# Altium PCB Tow_FOC.PcbDoc (part 3 of 3)
Units mil, origin at the board's own origin, x right, y up, seen from the top; angles counter-clockwise.
Board outline 3149.61 x 2165.35 mil, 4 copper layers (Top Layer, Layer 1, Layer 2, Bottom Layer), stack 23.756 mil thick; 186 components, 138 nets, 677 pads, 434 vias.
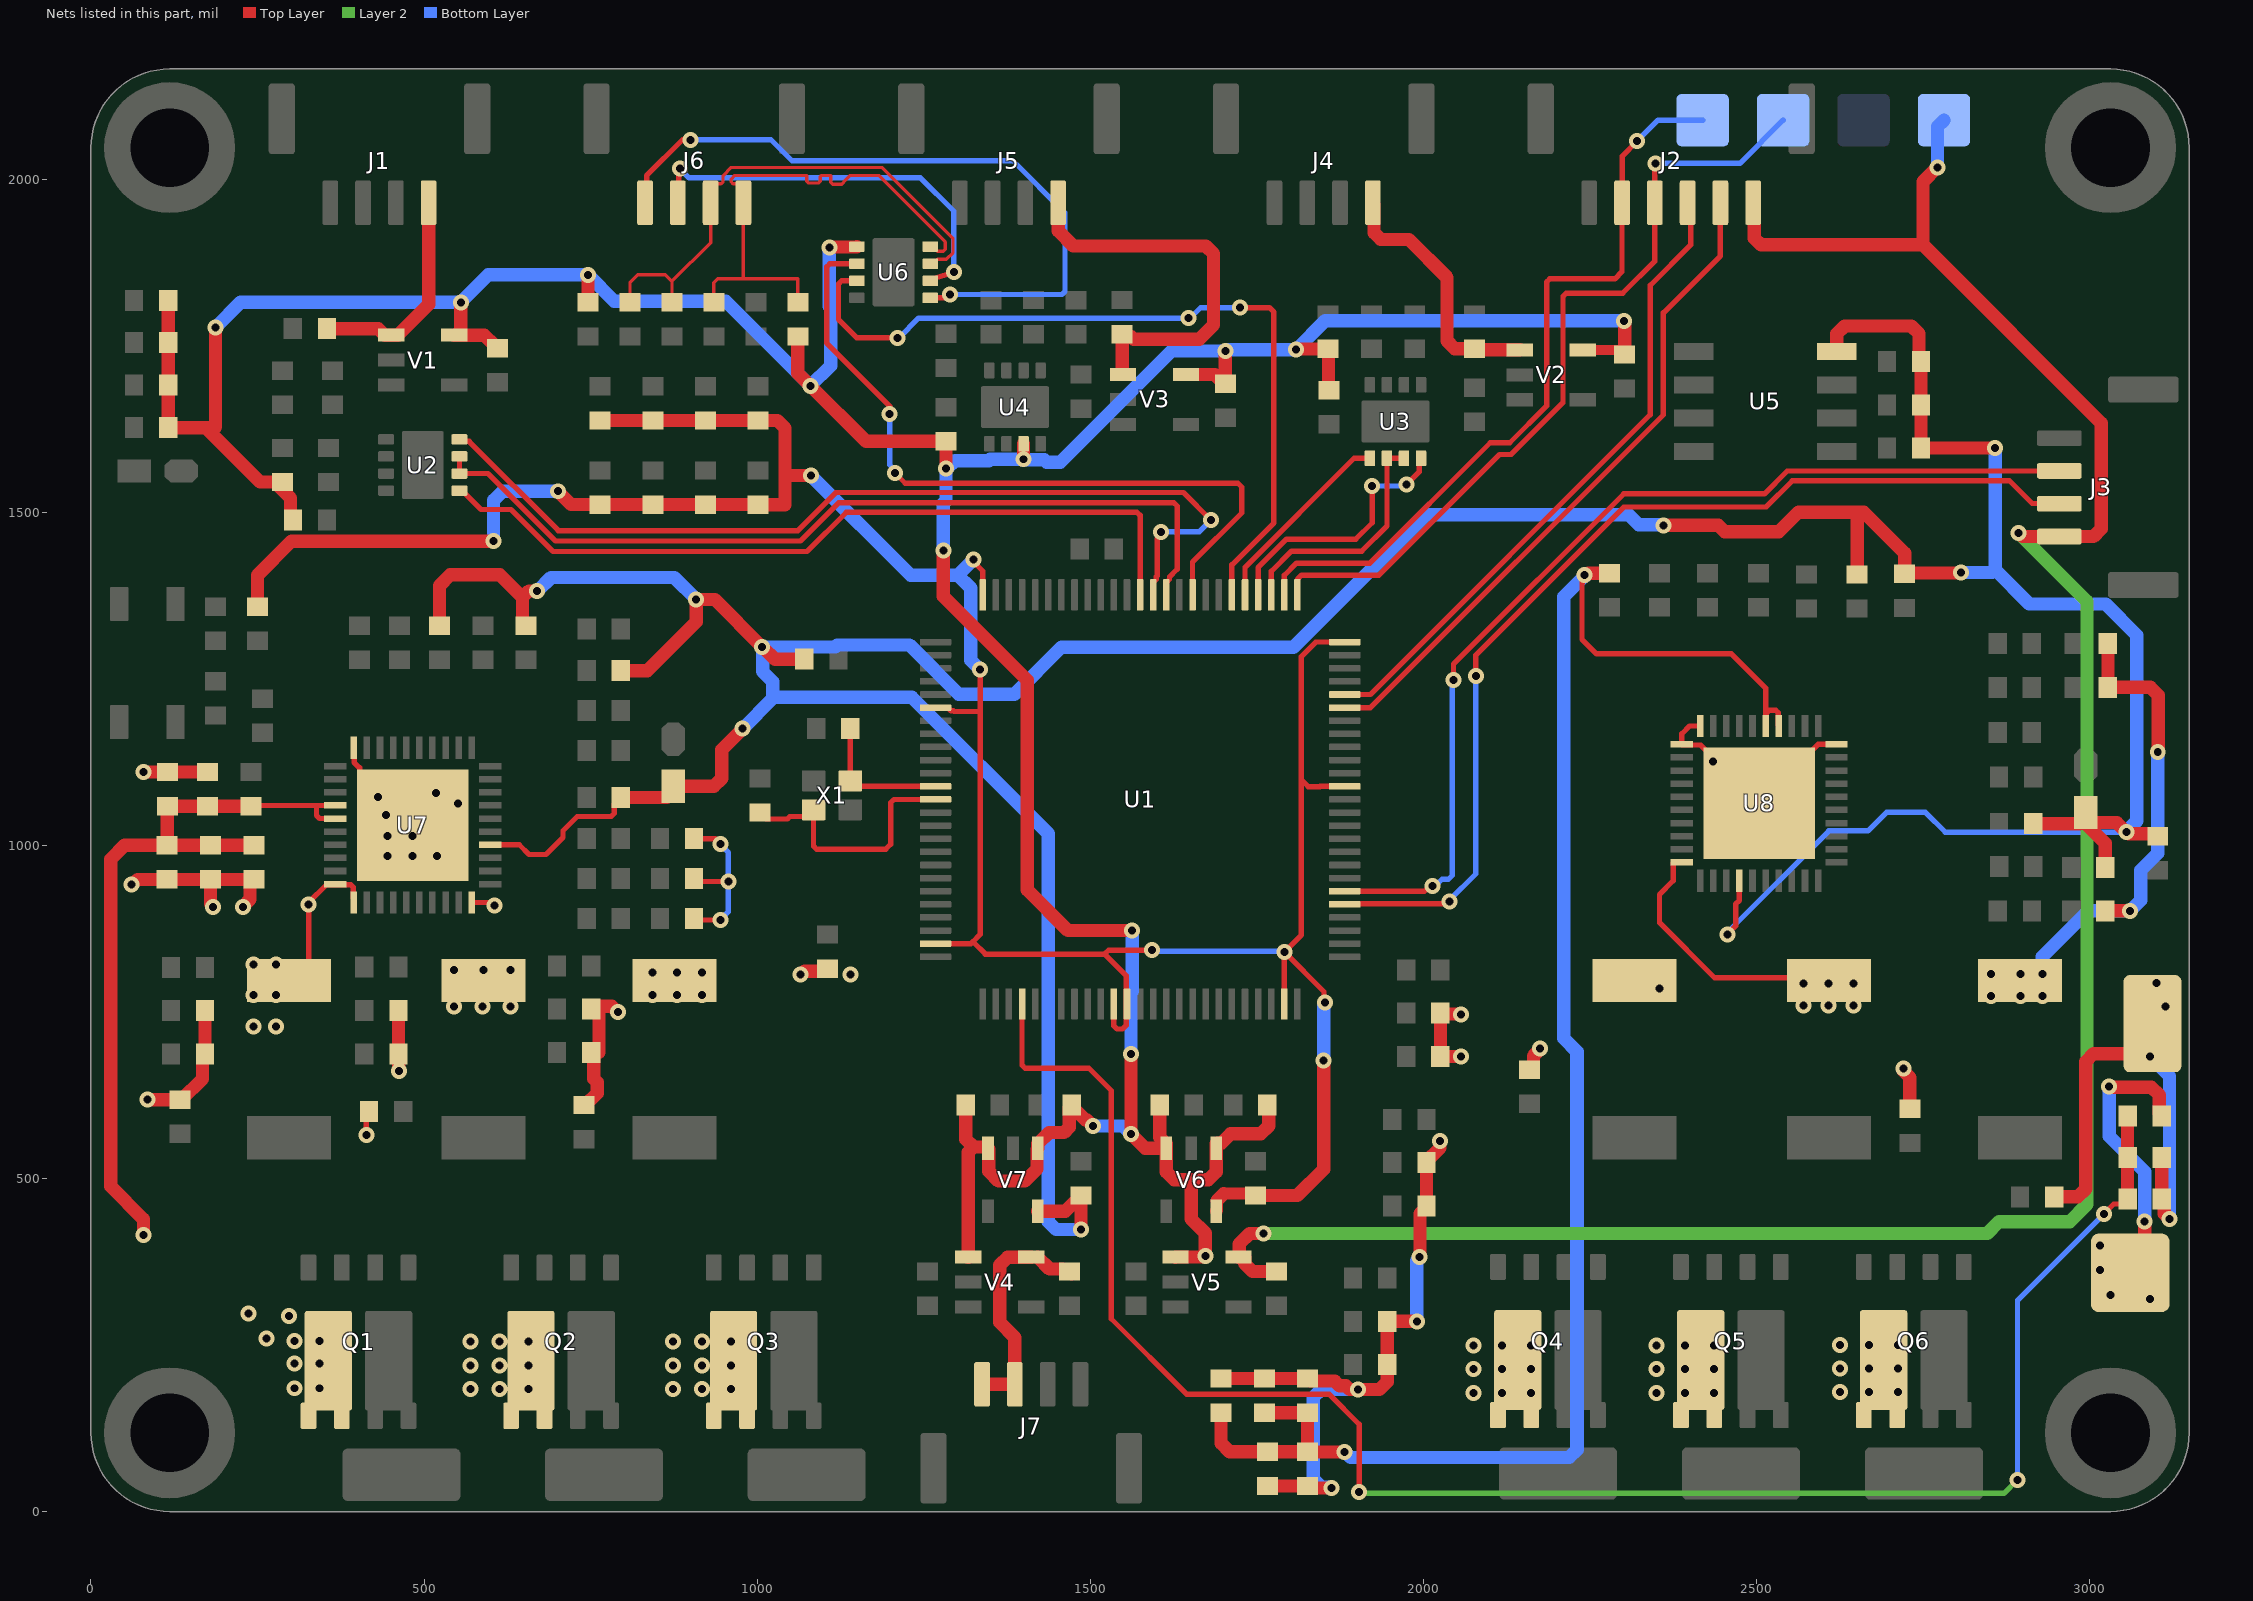
[diagram p5: the nets of this part, all layers, seen from the top]

## Via types
v1: diameter 24, hole 12, Top Layer to Bottom Layer, tented both sides, 434 vias

## Nets (pads, with @x,y where several pads share a name; then routed paths per layer and width w, separated by ;. In a path a pad name is that pad's centre, name@x,y a point inside that pad or via, vN(x,y) a via of type N, cw(c..) or ccw(c..) an arc to the next point about the centre after c; other vN are vias at no path point) (continued)
PGND: C31.1 C32.1 C34.1 C35.1 C36.1 C40.1 C41.1 C42.1 C43.2 C44.2 C45.2 C46.1 C47.1 C48.1 C49.1 C50.1 C52.1 C53.1 C54.1 C58.1 C59.1 C60.1 C61.2 C62.2 C63.2 C64.1 C65.1 C66.1 C67.1 R30.2 R34.1 R35.1 R36.1 R37.1 R38.1 R39.1 R55.1 R56.1 R57.1 R58.1 R59.1 R60.1 R74.2 TP12.1 U7.10 U7.11 U7.20 U7.40 U7.41 U8.10 U8.11 U8.20 U8.40 U8.41 | length 4984.1
  Top Layer w8: v1(244.09,775.59) 275.59,775.59 R37.1@297.24,797.24 298.29,797.24 326.77,825.72 v1(326.77,911.42) 326.77,914.12 353.5,940.85 365.97,940.85 U7.10@366.89,941.77 ; U7.10@367.72,940.94 389.76,940.94 393.52,937.18 393.52,921.04 U7.11@394.45,920.12 ; U7.40@394.45,1146.5 395.13,1145.82 395.13,1124.56 403.37,1116.32 403.37,1100.57 v1(431.1,1072.83) U7.41@440.55,1072.83 ; v1(413.39,564.96) 413.39,596.46 C44.2@417.33,600.4 ; U7.41@435.83,1077.56 U7.41@440.55,1072.83 ; U7.41@483.03,1030.36 U7.41@440.55,1072.83 ; U7.20@571.61,914.22 598.77,914.22 603.2,909.79 v1(606.04,909.79) ; R39.1@864.52,768.76 871.35,775.59 v1(879.92,775.59) ; C48.1@905.28,890 907.49,887.8 v1(944.88,887.8) ; C47.1@905.28,950 909.52,945.76 v1(956.69,945.76) ; C46.1@905.28,1010 936.85,1010 v1(944.88,1001.97) ; U8.20@2387.8,974.41 2375.98,974.41 2375.06,973.49 2375.06,946.91 2354.33,926.18 2354.33,883.86 2437.01,801.18 2562.65,801.18 v1(2570.87,792.96) ; U8.10@2415.35,1179.13 2399.61,1179.13 2387.8,1167.32 U8.11@2387.8,1151.57 2388.72,1150.65 2416.28,1150.65 2435.04,1131.89 v1(2435.04,1125.98) ; U8.41@2503.94,1062.99 2592.52,1151.57 U8.40@2620.08,1151.57
  Top Layer w20: v1(61.02,940.94) 62.11,940.94 69.98,948.82 C35.1@114.41,948.82 C36.1@179.41,948.82 ; v1(78.74,1110.24) 78.97,1110.01 C31.1@114.99,1110.01 C32.1@174.99,1110.01 ; v1(84.65,618.11) C43.2@133.86,618.11 ; C43.2@135.83,618.11 167.48,649.76 167.48,683.15 R34.1@171.26,686.93 C40.1@171.26,751.93 ; v1(183.07,907.48) 183.07,908.56 179.41,912.23 C36.1@179.41,948.82 ; v1(228.35,907.48) 228.35,908.56 238.66,918.87 238.66,945.04 C34.1@242.44,948.82 ; C34.1@244.41,948.82 C34.1@242.44,948.82 ; C41.1@461.61,747.05 R35.1@461.61,687.13 462.1,686.63 462.1,661.91 v1(462.6,661.42) ; C45.2@740.16,610.23 742.13,610.23 759.84,627.95 759.84,644.51 754.53,649.83 754.53,685.31 R36.1@750.75,689.09 ; C42.1@750.75,754.09 750.75,754.69 754.53,758.47 781.79,758.47 790.26,750 v1(791.34,750) ; R36.1@762.56,689.09 C42.1@762.56,754.09 ; v1(1064.96,806.1) 1066.04,806.1 1071.12,811.18 1101.53,811.18 R30.2@1103.13,812.78 ; C52.1@1696.34,199.57 C54.1@1761.34,199.57 C53.1@1826.34,199.57 1830.12,195.79 1867.08,195.79 1874.04,188.84 1883.6,188.84 1889.36,183.07 v1(1901.57,183.07) 1933.91,183.07 1945.63,194.79 R57.1@1945.63,220.58 C60.1@1945.63,285.59 1990,285.59 v1(1990.16,285.43) ; C50.1@1765.74,38.38 C49.1@1825.74,38.38 1828.69,35.43 v1(1862.2,35.43) ; v1(1994.09,381.89) 1994.86,382.66 1994.86,446.98 2004.68,456.8 R56.1@2004.68,458.77 C59.1@2004.68,523.78 2004.68,525.74 2024.48,545.54 2024.48,555.73 v1(2025.02,556.27) ; v1(2056.74,682.99) R55.1@2025.6,682.99 C58.1@2025.6,747.99 2026.76,746.83 2055.97,746.83 v1(2056.74,746.06) ; C61.2@2159.45,663.38 2161.42,663.38 2165.2,667.16 2165.2,683.8 2175.2,693.8 v1(2175.2,694.88) ; v1(2720.47,665.35) 2720.47,661.42 2730.32,651.57 C62.2@2730.32,604.33 ; C63.2@2946.85,472.44 2982.38,472.44 2994.09,484.15 2994.09,675.29 3005.81,687.01 3086.61,687.01 v1(3090.55,683.07) ; C64.1@3023.63,901.58 v1(3061.02,901.57) ; C66.1@3027.56,1303.15 C65.1@3027.56,1237.17 3091.41,1237.17 3103.13,1225.45 3103.13,1140.53 v1(3102.36,1139.76) ; C67.1@3108.27,531.5 R74.2@3108.26,468.99 3112.04,465.21 3112.04,447.01 v1(3120.08,438.98) ; C36.1@179.41,948.82 C34.1@242.44,948.82
  Bottom Layer w8: v1(944.88,887.8) 944.88,888.67 956.69,900.48 v1(956.69,945.76) 956.69,989.28 944.88,1001.09 v1(944.88,1001.97)
  Bottom Layer w20: v1(1862.2,35.43) 1861.44,36.2 1847.6,36.2 1834.65,49.15 1834.65,171.36 1846.36,183.07 v1(1901.57,183.07) ; v1(1990.16,285.43) 1990.16,376.87 1994.09,380.81 v1(1994.09,381.89) ; v1(2929.13,807.09) 2929.13,832.68 2998.03,901.57 v1(3061.02,901.57) 3076.77,917.32 3076.77,962.6 3102.36,988.19 v1(3102.36,1139.76) ; v1(3090.55,683.07) 3090.55,682.73 3120.08,653.2 v1(3120.08,438.98)
  other v1: 244.09,728.35 277.56,728.35 545.28,757.87 587.6,757.87 629.92,757.87 3114.17,757.87 2570.87,759.84 2608.27,759.84 2645.67,759.84 2852.02,773.62 2896.02,773.62 2929.13,773.62 277.56,775.59 842.52,775.59 917.32,775.59 2354.61,785.08 2608.27,792.96 2645.67,792.96 3100.39,793.31 1139.76,806.1 2852.02,807.09 2896.02,807.09 842.52,809.06 879.92,809.06 917.32,809.06 545.28,812.99 589.17,812.99 629.75,812.99 244.09,820.87 277.56,820.87 444.88,984.25 482.28,984.25 519.68,984.25 444.88,1013.78 482.28,1013.78 442.91,1045.28 551.18,1062.99 517.72,1078.74
RCC_OSC_IN: C15.2 U1.12 X1.3 | length 209.8
  Top Layer w8: C15.2@1139.76,1175.19 1139.84,1175.11 X1.3@1139.84,1096.65 1147.91,1088.58 U1.12@1267.72,1088.58
RCC_OSC_OUT: C14.2 U1.13 X1.1 | length 397.4
  Top Layer w8: C14.2@1003.93,1049.22 1013.58,1039.57 1045.35,1039.57 1048.96,1043.17 1074.55,1043.17 X1.1@1084.72,1053.35 ; X1.1@1084.65,1053.27 1084.65,998.78 1089.33,994.09 1192.91,994.09 1200.44,1001.62 1200.44,1063.86 1205.47,1068.9 U1.13@1267.72,1068.9
RS422_A: J6.1 R21.2 R22.2 U6.8 | length 792.7
  Top Layer w5: R22.2@935.04,1814.96 935.04,1844.49 940.94,1850.39 979.33,1850.39 ; 1061.02,1850.39 979.33,1850.39 ; R21.2@1061.03,1814.96 1061.03,1850.39 ; U6.8@1259.84,1898.62 1263.78,1898.62 1270.57,1891.83 1279.15,1891.83 1282.08,1894.76 1282.08,1905.75 1182.3,2005.53 1139.38,2005.53 1129.65,1995.8 1129.65,1995.06 1126.72,1992.13 1113.17,1992.13 1110.24,1995.06 1110.24,2005.53 1096.46,2005.53 1094.49,2003.56 1094.49,1997.02 1091.56,1994.09 1077.15,1994.09 1074.22,1997.02 1074.22,2005.53 966.14,2005.53 960.72,2000.11 960.72,1995.97 963.65,1993.04 970.05,1993.04 979.33,1983.77 979.33,1850.39
RS422_B: J6.2 R23.2 R24.2 U6.7 | length 784
  Top Layer w5: R24.2@809.06,1814.96 809.06,1844.49 820.87,1856.3 862.21,1856.3 872.05,1846.46 ; R23.2@872.05,1814.96 872.05,1846.46 ; U6.7@1259.84,1873.03 1263.78,1873.03 1270.57,1879.83 1284.12,1879.83 1294.08,1889.79 1294.08,1910.72 1187.27,2017.53 1114.17,2017.53 1097.84,2017.53 961.17,2017.53 948.72,2005.08 948.72,1995.97 945.8,1993.04 939.39,1993.04 930.12,1983.77 930.12,1904.53 872.05,1846.46
RS422_Y: J6.4 U6.5 | length 1061.6
  Top Layer w8: J6.4@831.69,1964.57 834.09,1966.96 834.09,2005.35 887.8,2059.06 v1(899.61,2059.06) ; U6.5@1259.84,1821.85 1284.45,1821.85 v1(1289.37,1826.77)
  Bottom Layer w8: v1(899.61,2059.06) 1020.67,2059.06 1052.17,2027.56 1383.86,2027.56 1462.11,1949.31 1462.11,1831.46 1457.43,1826.77 v1(1289.37,1826.77)
RS422_Z: J6.3 U6.6 | length 619.6
  Top Layer w8: J6.3@880.91,1964.57 882.38,1966.04 882.38,2014.27 v1(883.86,2015.75) ; U6.6@1259.84,1847.44 1267.65,1851.31 v1(1295.28,1860.24)
  Bottom Layer w8: v1(883.86,2015.75) 897.64,2001.97 1245.08,2001.97 1295.28,1951.77 v1(1295.28,1860.24)
SWCLK: J2.5 TP3.1 U1.77 | length 1150.8
  Top Layer w8: U1.77@1791.34,1375.98 1791.34,1405.41 1809.5,1423.58 1919.64,1423.58 2100.39,1604.33 2129.69,1604.33 2185.04,1659.68 2185.04,1845.71 2189.73,1850.39 2287.4,1850.39 2298.23,1861.22 J2.5@2298.23,1964.57 2298.72,1965.06 2298.72,2034.68 2320.87,2056.83 v1(2320.87,2057.09)
  Bottom Layer w8: v1(2320.87,2057.09) 2352.36,2088.58 TP3.1@2419.29,2088.58
SWDIO: J2.4 TP2.1 U1.76 | length 1216.8
  Top Layer w8: U1.76@1811.02,1375.98 1811.1,1376.06 1811.1,1399.72 1816.96,1405.58 1933.14,1405.58 2114.17,1586.61 2131.78,1586.61 2209.65,1664.48 2209.65,1824.05 2214.33,1828.74 2299.21,1828.74 2347.44,1876.97 J2.4@2347.44,1964.57 2347.44,2014.76 2348.43,2015.75 v1(2348.43,2023.62)
  Bottom Layer w8: v1(2348.43,2023.62) 2475.07,2023.62 TP2.1@2540.03,2088.58
U1_RX: J2.3 U1.71 | length 978.1
  Top Layer w8: U1.71@1881.89,1226.38 1920.46,1226.38 2340.55,1646.47 2340.55,1840.55 2401.57,1901.57 2401.57,1959.65 J2.3@2396.65,1964.57
U1_TX: J2.2 U1.70 | length 1014.1
  Top Layer w8: U1.70@1881.89,1206.69 1920.58,1206.69 2360.24,1646.35 2360.24,1799.21 2445.87,1884.84 J2.2@2445.87,1964.57
U2_DE: U1.86 U2.2 U2.3 | length 1310.6
  Top Layer w8: U2.3@553.15,1583.66 U2.2@553.15,1558.07 596.09,1558.07 697.47,1456.69 1065.07,1456.69 1122.38,1514 1625.61,1514 1630.51,1509.09 1630.51,1414.6 1618.94,1403.03 1618.94,1399.45 1614.17,1394.68 U1.86@1614.17,1375.98
U2_RX: U1.88 U2.1 | length 1205.3
  Top Layer w8: U2.1@553.15,1532.48 557.09,1532.48 585.41,1504.16 630.2,1504.16 693.42,1440.94 1074.8,1440.94 1133.86,1500 1570.12,1500 1574.8,1495.31 U1.88@1574.8,1375.98
U2_TX: U1.87 U2.4 | length 1406.3
  Top Layer w8: U2.4@553.15,1609.25 556.02,1606.38 567.58,1606.38 701.52,1472.44 1061.02,1472.44 1118.11,1529.53 1639.76,1529.53 v1@1680.64,1488.65 ; U1.87@1594.49,1375.98 1594.49,1394.68 1599.25,1399.45 1599.25,1403.03 1600.39,1404.17 1600.39,1460.24 1606.3,1466.14 v1(1606.3,1470.47)
  Bottom Layer w8: v1(1606.3,1470.47) 1663.39,1470.47 v1(1681.1,1488.19)
U3_RX: J3.3 U1.56 | length 1518.9
  Top Layer w8: U1.56@1881.89,931.1 2001.58,931.1 2009.45,938.98 v1(2013.78,938.98) ; J3.3@2954.72,1562.01 2546.26,1562.01 2511.81,1527.56 2300.84,1527.56 2045.31,1272.03 v1@2045.31,1248.07 ; v1(2045.28,1248.03) v1@2045.31,1248.07
  Bottom Layer w8: v1(2013.78,938.98) 2018.11,938.98 2028.2,949.07 2037.65,949.07 2043.31,954.72 2043.31,1246.06 v1(2045.28,1248.03)
U3_TX: J3.2 U1.55 | length 1544.3
  Top Layer w8: U1.55@1881.89,911.42 1882.81,912.34 2036.35,912.34 v1(2039.37,915.35) ; v1(2078.74,1253.94) 2078.74,1285.66 2300.95,1507.87 2514.52,1507.87 2553.89,1547.24 2879.92,1547.24 2913.95,1513.22 2954.3,1513.22 J3.2@2954.72,1512.8
  Bottom Layer w8: v1(2039.37,915.35) 2039.37,917.94 2078.74,957.31 v1(2078.74,1253.94)
U4_DE: U1.78 U3.2 U3.3 | length 364.3
  Top Layer w8: U1.78@1771.65,1375.98 1771.73,1376.06 1771.73,1411.26 1802.05,1441.58 1907.48,1441.58 1945.32,1479.41 U3.2@1945.32,1580.98 U3.3@1970.91,1580.98
U4_RX: U1.80 U3.1 | length 296.6
  Top Layer w8: U1.80@1732.28,1375.98 1732.28,1417.32 1895.95,1580.98 U3.1@1919.72,1580.98
U4_TX: U1.79 U3.4 | length 396
  Top Layer w8: U1.79@1751.97,1375.98 1751.97,1416.95 1794.59,1459.58 1898.56,1459.58 1923.23,1484.25 v1(1923.23,1539.37) ; v1(1974.41,1541.34) 1993.62,1560.55 1993.62,1578.11 U3.4@1996.5,1580.98
  Bottom Layer w8: v1(1923.23,1539.37) 1972.44,1539.37 v1(1974.41,1541.34)
U5_RX: U1.84 U6.2 | length 1120.7
  Top Layer w8: U6.2@1149.61,1873.03 1109.02,1873.03 1104.33,1868.35 1104.33,1753.94 1198.82,1659.45 v1(1198.82,1647.64) ; v1(1206.69,1559.06) 1222.22,1543.53 1721.47,1543.53 1727.4,1537.6 1727.4,1499.05 1653.54,1425.2 U1.84@1653.54,1375.98
  Bottom Layer w8: v1(1198.82,1647.64) 1198.82,1571.26 1206.69,1563.38 v1(1206.69,1559.06)
U5_TX: U1.81 U6.3 | length 1219.9
  Top Layer w8: U6.3@1149.61,1847.44 1126.73,1847.44 1122.05,1842.75 1122.05,1789.37 1149.61,1761.81 v1(1210.63,1761.81) ; U1.81@1712.6,1375.98 1712.6,1421.03 1775.59,1484.02 1775.59,1800.43 1768.94,1807.09 v1(1724.41,1807.09)
  Bottom Layer w8: v1(1210.63,1761.81) 1212.6,1761.81 1242.13,1791.34 v1(1647.64,1791.34) 1650.08,1791.34 1665.83,1807.09 v1(1724.41,1807.09)
VCC_3V3_M1: C19.2 C23.1 C39.2 C57.2 LED2.1 LED3.1 R19.2 R20.2 R42.1 R43.1 R45.1 R49.1 R63.1 R64.1 R66.1 R70.1 U5.8 U7.24 U8.24 V7.5 | length 7262.1
  Top Layer w8: U7.24@599.17,1000.83 642.87,1000.83 657.48,986.22 683.07,986.22 708.55,1011.7 708.55,1021.92 729.93,1043.31 780.75,1043.31 785.5,1048.06 785.5,1062.04 R45.1@795.28,1071.82 ; v1(2456.54,866.37) 2456.54,866.63 2468.72,878.81 2468.72,911.75 2474.41,917.44 U8.24@2474.41,946.85
  Top Layer w20: R49.1@523.18,1329.85 523.18,1389.86 539.28,1405.95 613.83,1405.95 647.64,1372.14 ; R42.1@653.18,1329.85 651.42,1329.85 647.64,1333.63 647.64,1372.14 ; v1(669.29,1381.89) 657.39,1381.89 647.64,1372.14 ; R45.1@795.28,1071.82 864.76,1071.82 874.02,1081.08 LED2.1@874.02,1088.58 935.13,1088.58 946.85,1100.3 946.85,1143.7 v1(978.35,1175.2) ; R43.1@795.28,1262.29 835.12,1262.29 908.46,1335.63 v1(908.46,1369.09) 936.1,1369.09 v1(1007.59,1297.6) 1008.67,1297.6 1026.74,1279.53 C39.2@1070.87,1279.53 ; V7.5@1421.26,450.79 1462.4,450.79 1480.47,468.86 1480.47,470.63 1484.25,474.41 C23.1@1486.22,474.41 v1(1486.22,423.23) ; v1(2360.24,1480.31) 2442.47,1480.31 2452.31,1470.47 2533.46,1470.47 2562.99,1500 2661.16,1500 ; U5.8@2620.55,1741.26 2620.55,1767.81 2632.27,1779.53 2732.38,1779.53 2744.09,1767.81 2744.09,1729.21 C19.2@2747.04,1726.26 R19.2@2747.04,1661.26 R20.2@2747.04,1596.26 2747.14,1596.36 2858.17,1596.36 v1(2858.27,1596.46) ; R63.1@2651.22,1406.62 2651.22,1490.06 2661.16,1500 ; v1(2807.09,1409.45) 2806.32,1408.68 2723.64,1408.68 R70.1@2722.44,1407.48 2722.44,1438.71 2661.16,1500 ; R66.1@2915.35,1032.45 2984.83,1032.45 LED3.1@2994.09,1041.71 ; LED3.1@2994.09,1049.21 LED3.1@2994.09,1041.71 ; R64.1@3023.63,966.53 3023.63,1002.91 2994.09,1032.45 LED3.1@2994.09,1041.71 ; C57.2@3102.37,1013.78 3098.59,1017.56 3058.33,1017.56 3056.2,1019.68 v1(3055.12,1019.68) 3040.59,1034.21 3001.59,1034.21 LED3.1@2994.09,1041.71
  Bottom Layer w8: v1(2456.54,866.37) 2456.54,869.54 2608.65,1021.65 2667.17,1021.65 2695.07,1049.56 2753.59,1049.56 2783.46,1019.68 v1(3055.12,1019.68)
  Bottom Layer w20: v1(669.29,1381.89) 670.37,1381.89 690.5,1402.02 875.54,1402.02 v1(908.46,1369.09) ; v1(978.35,1175.2) 1023.62,1220.47 ; v1(1486.22,423.23) 1448.72,423.23 1437.01,434.94 1437.01,1017.72 1232.28,1222.44 1025.59,1222.44 1023.62,1220.47 ; v1(2360.24,1480.31) 2359.47,1481.08 2323.22,1481.08 2308.24,1496.06 2003.94,1496.06 1805.12,1297.24 1456.69,1297.24 1386.24,1226.79 1302.74,1226.79 1228.79,1300.74 1120.3,1300.74 1117.16,1297.6 v1(1007.59,1297.6) 1008.36,1296.84 1008.36,1260.87 1023.62,1245.6 1023.62,1220.47 ; v1(2807.09,1409.45) 2854.33,1409.45 2858.27,1413.39 ; v1(2858.27,1596.46) 2858.27,1413.39 ; v1(3055.12,1019.68) 3055.12,1020.77 3070.87,1036.52 3070.87,1315.5 3024.11,1362.26 2909.4,1362.26 2858.27,1413.39
VCC_3V3_MCU: C1.1 C2.1 C3.1 C4.1 C5.1 C6.1 C7.1 C8.1 C22.1 R7.1 U1.6 U1.24 U1.36 U1.37 U1.49 U1.64 U1.75 U1.100 V6.5 | length 4321.2
  Top Layer w8: U1.24@1267.72,852.36 1320.87,852.36 1323.82,855.32 ; U1.6@1267.72,1206.69 1286.42,1206.69 1291.18,1201.93 1294.76,1201.93 1295.9,1200.79 1334.65,1200.79 ; v1(1324.8,1429.13) 1324.8,1425.39 1338.58,1411.61 U1.100@1338.58,1375.98 ; v1(1334.65,1263.78) 1334.65,1200.79 ; U1.36@1535.43,761.81 1535.43,729.1 1540.12,724.41 1548.46,724.41 1554.2,730.14 1554.2,760.89 U1.37@1555.12,761.81 1554.2,762.73 1554.2,804.07 1521.65,836.61 ; v1(1592.52,842.52) 1527.56,842.52 1521.65,836.61 ; U1.49@1791.34,761.81 v1(1791.34,839.8) ; v1(1852.36,763.78) 1850.89,765.25 1850.89,780.25 v1(1791.34,839.8) ; U1.64@1881.89,1088.58 1845.14,1088.58 1844.52,1087.96 1827.39,1087.96 1816.93,1098.43 ; U1.75@1881.89,1305.12 1838.58,1305.12 1816.93,1283.46 1816.93,1098.43 ; 1323.82,855.32 1334.65,866.14 1334.65,1200.79 ; 1323.82,855.32 1342.52,836.61 1521.65,836.61 ; v1(1791.34,839.8) 1816.93,865.39 1816.93,1098.43
  Top Layer w18: V6.5@1688.98,450.79 1690.12,451.93 V6.5@1690.12,466.63 ; 1700.51,477.03 C22.1@1743.44,477.03
  Top Layer w20: R7.1@250,1358.27 250,1405.51 300.93,1456.44 604.08,1456.44 v1(604.33,1456.69) ; v1(700.79,1531.5) 720.79,1511.49 C3.1@764.27,1511.49 C1.1@843.33,1511.49 C7.1@922.39,1511.49 C5.1@1001.45,1511.49 1001.83,1511.11 1041.83,1511.11 1041.83,1555.12 ; C4.1@764.27,1637.79 C2.1@843.33,1637.79 C8.1@922.39,1637.79 C6.1@1001.45,1637.79 1030.12,1637.79 1041.83,1626.08 1041.83,1555.12 ; v1(1080.71,1555.12) 1041.83,1555.12 ; V6.5@1690.12,466.63 1700.51,477.03 ; C22.1@1743.44,477.03 C22.1@1746.07,474.41 ; C22.1@1748.03,474.41 1811.02,474.41 1850.39,513.78 v1(1850.39,677.17)
  Bottom Layer w8: v1(1592.52,842.52) 1593.88,841.16 1789.98,841.16 v1(1791.34,839.8)
  Bottom Layer w20: v1(604.33,1456.69) 604.33,1517.81 618.01,1531.5 v1(700.79,1531.5) ; v1(1080.71,1555.12) 1230.32,1405.51 1301.18,1405.51 ; v1(1324.8,1429.13) 1301.18,1405.51 ; v1(1334.65,1263.78) 1320.47,1277.95 1320.47,1386.22 1301.18,1405.51 ; v1(1850.39,677.17) 1850.39,760.73 1852.36,762.7 v1(1852.36,763.78)
VCC_5V: C9.2 C11.2 C16.2 C20.2 C24.1 C25.1 C26.1 C27.1 C28.2 C29.1 C30.1 R1.2 R3.2 R6.2 R9.2 R16.2 R21.1 R29.1 U4.3 U6.1 V1.5 V2.5 V3.5 V4.1 V5.1 V6.1 V6.3 V7.1 V7.3 | length 6262.6
  Top Layer w15: V2.5@2239.33,1743.62 2293.31,1743.62 2300.12,1736.81 R9.2@2302.09,1736.81
  Top Layer w20: C28.2@115.78,1818.18 C29.1@115.79,1754.43 C30.1@115.79,1690.68 R29.1@115.79,1626.93 172.28,1626.93 ; v1(187.01,1777.56) 187.01,1627.95 185.99,1626.93 172.28,1626.93 ; R1.2@280.48,1540.32 299.37,1521.42 299.37,1491.97 C9.2@303.15,1488.19 ; R1.2@287.4,1545.28 253.94,1545.28 172.28,1626.93 ; V1.5@545.28,1765.75 V1.5@554.8,1765.75 ; v1(555.12,1814.96) 555.12,1775.59 554.96,1775.43 554.96,1765.91 V1.5@554.8,1765.75 ; R3.2@610.24,1746.06 608.27,1746.06 604.49,1749.84 604.49,1751.81 590.55,1765.75 V1.5@554.8,1765.75 ; C20.2@746.07,1814.96 v1(746.06,1856.3) ; R21.1@1061.03,1763.78 1061.03,1708.66 v1(1079.94,1689.74) 1163.38,1606.3 C16.2@1283.46,1606.3 v1(1283.46,1565.53) ; v1(1108.27,1897.64) 1108.76,1898.13 1149.11,1898.13 U6.1@1149.61,1898.62 ; v1(1279.53,1442.91) 1279.53,1374.02 1405.51,1248.03 1405.51,933.07 1466.54,872.05 v1(1562.99,872.05) ; C26.1@1312.99,610.24 1312.99,558.96 1324.71,547.24 ; V4.1@1316.93,381.89 1316.93,539.47 1324.71,547.24 ; v1@1399.78,1579.55 U4.3@1399.8,1602.64 ; v1(1503.94,578.74) 1494.43,588.25 1492.47,588.25 1472.44,608.27 C27.1@1472.44,610.24 1468.66,606.46 1468.66,576.93 1460.63,568.9 1438.31,568.9 1421.26,551.85 V7.1@1421.26,545.28 1420.12,544.13 1420.12,514.51 1401.67,496.06 1362.2,496.06 1347.6,510.67 1347.6,544.13 V7.3@1346.46,545.28 1346.46,546.1 1345.31,547.24 1324.71,547.24 ; v1(1561.02,687.01) v1(1561.02,566.93) 1582.68,545.28 V6.3@1614.17,545.28 ; C25.1@1604.33,610.24 1604.33,561.7 1614.17,551.85 V6.3@1614.17,545.28 ; V5.1@1627.95,381.89 1628.11,382.05 1670.33,382.05 1672.15,383.86 v1(1673.23,383.86) 1672.46,384.62 1672.46,418.1 1651.57,438.99 1651.57,498.03 ; V3.5@1643.7,1706.69 1687.01,1706.69 1700.79,1692.91 R16.2@1702.76,1692.91 v1(1702.76,1742.13) ; C24.1@1765.75,610.24 1767.72,608.27 1767.72,578.64 1756,566.93 1710.63,566.93 1696.69,552.99 1690.12,552.99 1688.98,551.85 V6.1@1688.98,545.28 1688.98,509.75 1677.26,498.03 1651.57,498.03 ; v1(1809.06,1744.09) 1810,1745.04 1857.68,1745.04 1857.68,1683.66 C11.2@1858.27,1683.07 ; v1(2301.18,1787.4) 2302.09,1786.49 R9.2@2302.09,1736.81 ; V6.3@1614.17,545.28 1614.17,509.75 1625.89,498.03 1651.57,498.03
  Bottom Layer w20: v1(187.01,1777.56) 224.41,1814.96 v1(555.12,1814.96) ; v1@555.88,1815.73 596.46,1856.3 v1(746.06,1856.3) 785.43,1816.93 952.76,1816.93 v1(1079.94,1689.74) 1110.24,1720.03 1110.24,1807.31 1108.27,1809.28 v1(1108.27,1897.64) ; v1(1279.53,1442.91) 1279.53,1513.53 1283.46,1517.46 v1@1283.46,1564.96 ; v1(1283.46,1565.53) v1@1283.46,1564.96 ; v1@1399.7,1577.68 1400.79,1578.76 1430.77,1578.76 1434.72,1574.8 1454.72,1574.8 1622.05,1742.13 v1(1702.76,1742.13) 1703.84,1742.13 1705.81,1744.09 v1(1809.06,1744.09) 1852.36,1787.4 v1(2301.18,1787.4) ; v1(1399.75,1579.53) 1349.89,1579.53 1347.7,1577.34 1296.93,1577.34 1284.55,1564.96 v1@1283.46,1564.96 ; v1(1503.94,578.74) 1549.21,578.74 v1(1561.02,566.93) ; v1(1561.02,687.01) 1561.02,778.93 1562.99,780.89 v1(1562.99,872.05)
VCC_5V_CAN1: C17.2 J5.1 V3.1 | length 606.5
  Top Layer w20: J5.1@1451.77,1964.57 1451.77,1922.24 1474.41,1899.61 1673.32,1899.61 1685.04,1887.89 1685.04,1781.5 1663.39,1759.84 1565.37,1759.84 1561.71,1763.51 1551.69,1763.51 C17.2@1547.91,1767.29 1547.91,1708 V3.1@1549.21,1706.69
VCC_5V_DEG: J2.1 J3.1 R27.2 TP1.1 V5.5 | length 3608.9
  Top Layer w20: V5.5@1722.44,381.89 1723.33,381.89 1723.48,382.05 1723.48,401.67 1739.14,417.32 v1(1759.84,417.32) ; V5.5@1732.12,381.73 1732.12,372.2 1744.1,360.23 R27.2@1779.53,360.23 ; J2.1@2495.08,1964.57 2496.89,1962.76 2496.89,1911.48 2506.79,1901.57 2750,1901.57 ; v1(2771.65,2017.72) 2750,1996.06 2750,1901.57 ; v1(2893.7,1468.5) 2894.78,1468.5 2899.7,1463.58 J3.1@2954.72,1463.58 3006,1463.58 3017.72,1475.3 3017.72,1633.86 2750,1901.57
  Layer 2 w20: v1(1759.84,417.32) 2846.23,417.32 2863.95,435.04 2970.25,435.04 2996.06,460.86 2996.06,1366.14 v1(2893.7,1468.5)
  Bottom Layer w20: v1(2771.65,2017.72) 2771.65,2078.74 TP1.1@2781.5,2088.58
VCC_5V_ENC1: C10.2 J1.1 V1.1 | length 328.2
  Top Layer w20: C10.2@354.33,1775.59 431.42,1775.59 441.26,1765.75 V1.1@450.79,1765.75 460.32,1765.75 506.89,1812.32 J1.1@506.89,1964.57
VCC_5V_ENC2: C12.2 J4.1 V2.1 | length 393.2
  Top Layer w20: J4.1@1924.21,1964.57 1926.02,1962.76 1926.02,1919.35 1935.93,1909.45 1978.35,1909.45 2035.43,1852.36 2035.43,1757.35 2047.15,1745.63 C12.2@2077.08,1745.63 2078.94,1743.78 2144.69,1743.78 V2.1@2144.84,1743.62
VCC_5V_IN: J7.1 J7.2 R25.2 V4.5 | length 340.2
  Top Layer w20: J7.1@1337.6,190.94 J7.2@1386.81,190.94 1386.81,261.24 1364.17,283.88 1364.17,370.08 1375.89,381.79 1411.32,381.79 V4.5@1411.42,381.89 ; V4.5@1420.94,381.89 1438.82,364.01 R25.2@1458.5,364.01 ; R25.2@1468.51,360.23 R25.2@1472.29,356.45
VM: C31.2 C32.2 C33.2 C34.2 C35.2 C36.2 C49.2 C50.2 C51.2 C52.2 C53.2 C54.2 Q1.5 Q1.6 Q2.5 Q2.6 Q3.5 Q3.6 Q4.5 Q4.6 Q5.5 Q5.6 Q6.5 Q6.6 R73.1 TP11.1 U7.4 U7.5 U8.4 U8.5 | length 5114.3
  Top Layer w8: C33.2@239.99,1058.83 241.05,1059.89 340.31,1059.89 ; U7.5@366.89,1040.2 343.27,1040.2 338.58,1044.89 338.58,1058.16 340.31,1059.89 ; U7.4@366.89,1059.89 340.31,1059.89 ; v1(2241.69,1405.5) 2238.62,1402.43 2238.62,1393.24 2238.19,1392.81 2238.19,1309.06 2259.84,1287.4 2462.6,1287.4 2513.78,1236.22 U8.5@2513.78,1179.13 2514.7,1180.06 2514.7,1198.07 2519.39,1202.76 2528.78,1202.76 2532.54,1198.99 2532.54,1180.06 U8.4@2533.46,1179.13
  Top Layer w20: v1(78.74,415.35) 78.74,438.98 29.53,488.19 29.53,979.17 50.36,1000 C35.2@114.41,1000 ; C33.2@239.99,1058.83 C32.2@174.99,1058.83 C31.2@114.99,1058.83 114.7,1058.53 114.7,1000.29 C35.2@114.41,1000 ; C34.2@244.41,1000 C36.2@179.41,1000 C35.2@114.41,1000 ; C52.2@1696.34,148.39 1696.34,102.27 1709.04,89.56 C50.2@1765.74,89.56 C49.2@1825.74,89.56 ; C54.2@1761.34,148.39 C53.2@1826.34,148.39 1826.04,148.1 1826.04,89.86 C49.2@1825.74,89.56 ; v1(1881.54,89.07) 1881.3,89.32 1825.99,89.32 C49.2@1825.74,89.56 ; v1(2241.69,1405.5) 2242.45,1406.26 2245.28,1406.26 2247.6,1408.58 C51.2@2279.52,1408.58 ; v1(3029.53,637.8) 3030.29,637.03 3092.77,637.03 3104.49,625.31 3104.49,597.77 R73.1@3108.27,594 ; v1(3082.68,435.04) 3082.68,383.86 TP11.1@3086.61,379.92
  Bottom Layer w20: v1(1881.54,89.07) 1882.63,89.07 1890.55,81.15 ; 2230.76,690.04 2230.76,92.86 2219.04,81.15 ; v1(2241.69,1405.5) 2241.69,1404.41 2239.69,1402.41 2210.63,1373.35 2210.63,710.17 2230.31,690.48 2230.31,92.42 2219.04,81.15 ; v1(3029.53,637.8) 3029.53,563.15 3082.68,510 v1(3082.68,435.04) ; 1890.55,81.15 2219.04,81.15 ; 1890.55,81.15 2219.04,81.15
  other v1: 2075,178.15 2118.41,178.15 2161.81,178.15 2349.61,178.15 2393.01,178.15 2436.42,178.15 2625.3,179.23 2668.7,179.23 2712.11,179.23 569.88,184.05 613.29,184.05 656.69,184.05 874.02,184.05 917.42,184.05 960.83,184.05 305.32,185.04 342.72,185.04 2075,213.58 2118.41,213.58 2161.81,213.58 2349.61,213.58 2393.01,213.58 2436.42,213.58 2625.3,214.67 2668.7,214.67 2712.11,214.67 569.88,219.49 613.29,219.49 656.69,219.49 874.02,219.49 917.42,219.49 960.83,219.49 305.32,222.44 342.72,222.44 2075,249.02 2118.41,249.02 2161.81,249.02 2349.61,249.02 2393.01,249.02 2436.42,249.02 2625.3,250.1 2668.7,250.1 2712.11,250.1 569.88,254.92 613.29,254.92 656.69,254.92 874.02,254.92 917.42,254.92 960.83,254.92 305.32,255.91 342.72,255.91 263.78,259.84 297.24,293.31 236.22,297.24 3090.55,318.9 3031.5,324.8 3015.75,362.2 3015.75,399.61
VSEN_VM: C67.2 R73.2 R74.1 U1.29 | length 2743.3
  Top Layer w8: U1.29@1397.64,761.81 1397.64,670.04 1402.32,665.35 1498.03,665.35 1531.5,631.89 1531.5,289.37 1645.07,175.79 1858.8,175.79 1903.54,131.05 v1(1903.54,29.53) ; v1(3021.65,446.85) 3036.36,461.56 3049.65,461.56 R74.1@3057.08,468.99
  Top Layer w20: R74.1@3057.08,468.99 C67.2@3057.09,531.5 R73.2@3057.09,594
  Layer 2 w8: v1(1903.54,29.53) 1905.86,27.21 2871.31,27.21 v1(2891.73,47.64)
  Bottom Layer w8: v1(2891.73,47.64) 2891.73,316.93 v1(3021.65,446.85)
pads on no net: U1.10 U1.11 U1.15 U1.16 U1.17 U1.18 U1.25 U1.30 U1.31 U1.32 U1.33 U1.34 U1.38 U1.42 U1.44 U1.47 U1.50 U1.51 U1.52 U1.53 U1.54 U1.57 U1.58 U1.59 U1.72 U1.73 U1.85 U1.89 U1.93 U1.94 U4.5 V6.4 V7.4

## Polygon pours and split planes (outlines as drawn)
GND on Top Layer "GND_L01_P224" (solid, remove dead copper, pour order 224): 0,118.11 0,2047.24 cw(c118.11,2047.24) 118.11,2165.35 3031.5,2165.35 cw(c3031.5,2047.24) 3149.61,2047.24 3149.61,118.11 cw(c3031.5,118.11) 3031.5,0 118.11,0 cw(c118.11,118.11)
PGND on Top Layer "PGND_L01_P196" (solid, remove dead copper, pour order 196): 520.34,831.7 667.91,854.33 667.91,687.73 530.19,716.69
M2_SPB on Top Layer "M2_SPB_L01_P210" (solid, remove dead copper, pour order 210): 2688.98,662.4 2694.88,656.5 2694.88,524.61 2476.38,524.61 2476.38,662.4 2541.34,662.4
M2_SHC on Top Layer "NONET_L01_P-001" (solid, remove dead copper, pour order 213): 2687.01,392.72 2687.01,344.27 2744.09,300.24 2744.09,19.68 2842.72,19.68 2842.72,300.98 2826.77,316.93 2768.9,316.93 2736.42,349.41 2736.42,392.72
M2_SPC on Top Layer "M2_SPC_L01_P195" (solid, remove dead copper, pour order 195): 2859.25,338.58 2859.25,568.9 2857.28,570.87 2777.56,570.87 2777.56,436.02 2792.32,421.26 2792.32,338.58
PGND on Top Layer "PGND_L01_P192" (solid, remove dead copper, pour order 192): 2381.89,836.61 2381.89,728.35 2372.05,718.5 2236.22,718.5 2236.22,842.52 2238.19,844.49
VM on Top Layer "VM_L01_P201" (solid, remove dead copper, pour order 201): 2608.27,134.59 2608.27,305.12 2708.66,305.12 2730.32,283.46 2730.32,117.02 2646.47,117.02 2617.38,130.8
VM on Top Layer "VM_L01_P199" (solid, remove dead copper, pour order 199): 2333.27,134.98 2333.27,305.51 2433.66,305.51 2455.32,283.86 2455.32,117.41 2371.47,117.41 2342.38,131.19
VM on Top Layer "VM_L01_P200" (solid, remove dead copper, pour order 200): 2059.06,134.59 2059.06,305.12 2159.45,305.12 2181.1,283.46 2181.1,117.02 2097.25,117.02 2068.16,130.8
M2_SHB on Top Layer "NONET_L01_P-001" (solid, remove dead copper, pour order 212): 2412.4,392.72 2412.4,344.27 2469.49,300.24 2469.49,19.68 2568.11,19.68 2568.11,300.98 2552.17,316.93 2494.29,316.93 2461.81,349.41 2461.81,392.72
M2_SHA on Top Layer "NONET_L01_P-001" (solid, remove dead copper, pour order 214): 2137.8,392.72 2137.8,344.27 2194.88,300.24 2194.88,19.68 2293.5,19.68 2293.5,300.98 2277.56,316.93 2219.69,316.93 2187.2,349.41 2187.2,392.72
M2_SPB on Top Layer "M2_SPB_L01_P197" (solid, remove dead copper, pour order 197): 2584.65,338.58 2584.65,568.9 2582.68,570.87 2483.03,570.87 2475.16,562.99 2475.16,463.82 2517.72,421.26 2517.72,338.58
M2_SPA on Top Layer "M2_SPA_L01_P191" (solid, remove dead copper, pour order 191): 2297.24,340.55 2297.24,555.12 2291.34,561.02 2196.85,561.02 2196.85,462.6 2244.09,415.35 2242.13,413.39 2242.13,340.55
PGND on Top Layer "PGND_L01_P193" (solid, remove dead copper, pour order 193): 2974.41,844.49 2974.41,742.13 2960.63,728.35 2814.96,728.35 2814.96,842.52 2816.93,844.49
VM on Top Layer "VM_L01_P205" (solid, remove dead copper, pour order 205): 840.55,150.75 840.55,312.99 986.22,312.99 1001.97,297.24 1001.97,118.11 914.92,118.11 885.83,131.89
VM on Top Layer "VM_L01_P204" (solid, remove dead copper, pour order 204): 537.4,150.34 537.4,312.99 682.09,312.99 697.83,297.24 697.83,118.11 610.78,118.11 581.69,131.89
PGND on Top Layer "PGND_L01_P198" (solid, remove dead copper, pour order 198): 797.24,842.52 954.72,842.52 954.72,706.69 797.24,706.69
M1_SPA on Top Layer "M1_SPA_L01_P207" (solid, remove dead copper, pour order 207): 204.72,613.78 198.82,607.87 198.82,475.98 411.72,475.98 371.23,603.91 352.36,613.78
M1_SPB on Top Layer "M1_SPB_L01_P206" (solid, remove dead copper, pour order 206): 508.86,613.78 502.95,607.87 502.95,475.98 698.82,475.98 698.82,613.78 656.5,613.78
M1_SPA on Top Layer "M1_SPA_L01_P187" (solid, remove dead copper, pour order 187): 507.33,352.8 499.7,411.55 468.5,459.65 413.39,514.76 397.64,538.19 301.18,548.23 301.18,512.8 330.71,483.27 364.17,483.27 454.72,392.72 454.72,345.47 500,345.47
M1_SPB on Top Layer "M1_SPB_L01_P185" (solid, remove dead copper, pour order 185): 806.1,347.44 796.26,423.23 772.64,459.65 723.43,508.86 723.43,534.45 707.68,550.2 607.28,550.2 605.31,548.23 605.31,512.8 634.84,483.27 668.31,483.27 758.86,392.72 758.86,345.47 804.13,345.47
M1_SPC on Top Layer "M1_SPC_L01_P186" (solid, remove dead copper, pour order 186): 1110.24,347.44 1100.39,423.23 1076.77,459.65 1027.56,508.86 1027.56,544.29 1021.65,550.2 911.42,550.2 909.45,548.23 909.45,512.8 938.98,483.27 972.44,483.27 1062.99,392.72 1062.99,345.47 1108.27,345.47
M1_SPC on Top Layer "M1_SPC_L01_P208" (solid, remove dead copper, pour order 208): 812.99,613.78 807.09,607.87 807.09,475.98 1025.59,475.98 1025.59,613.78 960.63,613.78
M1_SHC on Top Layer "NONET_L01_P-001" (solid, remove dead copper, pour order 217): 960.63,391.73 960.63,343.29 1017.72,299.25 1017.72,11.81 1116.34,11.81 1116.34,307.09 1088.78,334.65 1023.82,334.65 1010.04,348.42 1010.04,391.73
M2_SPA on Top Layer "M2_SPA_L01_P211" (solid, remove dead copper, pour order 211): 2408.07,661.02 2413.98,655.12 2413.98,523.23 2195.47,523.23 2195.47,661.02 2260.43,661.02
M2_SPC on Top Layer "M2_SPC_L01_P209" (solid, remove dead copper, pour order 209): 2968.5,651.57 2974.41,645.67 2974.41,513.78 2777.56,513.78 2777.56,651.57 2820.87,651.57
VM on Top Layer "VM_L01_P203" (solid, remove dead copper, pour order 203): 277.56,141.73 277.56,214.57 171.26,320.87 362.2,320.87 393.7,289.37 393.7,118.11 310.63,118.11
PGND on Top Layer "PGND_L01_P183" (solid, remove dead copper, pour order 183): 3047.24,805.12 3141.73,805.12 3141.73,655.51 3047.24,655.51
VM on Top Layer "VM_L01_P184" (solid, remove dead copper, pour order 184): 2998.03,419.29 3106.3,419.29 3122.05,403.54 3122.05,303.15 3118.11,299.21 3019.68,299.21 2998.03,320.87
M1_SHC on Top Layer "M1_SHC_L01_P190" (solid, remove dead copper, pour order 190): 978.35,96.46 1165.35,96.46 1165.35,11.81 1163.39,9.84 986.22,9.84 978.35,17.72
M1_SHB on Top Layer "M1_SHB_L01_P188" (solid, remove dead copper, pour order 188): 674.21,96.46 861.22,96.46 861.22,11.81 859.25,9.84 682.09,9.84 674.21,17.72
M1_SHB on Top Layer "NONET_L01_P-001" (solid, remove dead copper, pour order 215): 656.5,391.73 656.5,343.29 713.58,299.25 713.58,11.81 812.2,11.81 812.2,307.09 784.65,334.65 719.69,334.65 705.91,348.42 705.91,391.73
M1_SHA on Top Layer "M1_SHA_L01_P189" (solid, remove dead copper, pour order 189): 370.08,96.46 557.09,96.46 557.09,11.81 555.12,9.84 377.95,9.84 370.08,17.72
M1_SHA on Top Layer "NONET_L01_P-001" (solid, remove dead copper, pour order 216): 352.36,391.73 352.36,343.29 409.45,299.25 409.45,11.81 508.07,11.81 508.07,307.09 480.51,334.65 415.55,334.65 401.77,348.42 401.77,391.73
PGND on Top Layer "PGND_L01_P202" (solid, remove dead copper, pour order 202): 218.5,854.33 375.98,854.33 375.98,698.82 218.5,698.82
PGND on Top Layer "PGND_L01_P181" (solid, remove dead copper, pour order 181): 1156.5,837.6 1156.5,772.64 1048.23,772.64 1048.23,837.6
GND on Top Layer "GND_L01_P182" (solid, remove dead copper, pour order 182): 1156.5,911.42 1156.5,846.46 1048.23,846.46 1048.23,911.42
PGND on Top Layer "PGND_L01_P194" (solid, remove dead copper, pour order 194): 2687.6,844.49 2687.6,742.13 2663.98,718.5 2528.15,718.5 2528.15,842.52 2530.12,844.49
GND on Layer 2 "GND_L03_P227" (solid, remove dead copper, pour order 227): 0,118.11 0,2047.24 cw(c118.11,2047.24) 118.11,2165.35 3031.5,2165.35 cw(c3031.5,2047.24) 3149.61,2047.24 3149.61,118.11 cw(c3031.5,118.11) 3031.5,0 118.11,0 cw(c118.11,118.11)
VM on Layer 2 "VM_L03_P221" (solid, remove dead copper, pour order 221): 3143.7,507.87 107.29,507.87 21.94,422.52 21.94,0 3027.56,0 3143.7,17.72 3161.42,490.16
GND on Layer 1 "GND_L02_P226" (solid, remove dead copper, pour order 226): 0,118.11 0,2047.24 cw(c118.11,2047.24) 118.11,2165.35 3031.5,2165.35 cw(c3031.5,2047.24) 3149.61,2047.24 3149.61,118.11 cw(c3031.5,118.11) 3031.5,0 118.11,0 cw(c118.11,118.11)
PGND on Layer 1 "PGND_L02_P219" (solid, remove dead copper, pour order 219): 0.98,1384.84 3128.94,1384.84 3152.56,1361.22 3152.56,528.54 3148.62,524.61 4.92,524.61 2.95,526.57 2.95,1382.87
GND on Bottom Layer "GND_L04_P225" (solid, remove dead copper, pour order 225): 0,118.11 0,2047.24 cw(c118.11,2047.24) 118.11,2165.35 3031.5,2165.35 cw(c3031.5,2047.24) 3149.61,2047.24 3149.61,118.11 cw(c3031.5,118.11) 3031.5,0 118.11,0 cw(c118.11,118.11)

## Other copper
Top Layer:
  pour cut-out: 1041.34,1003.94 1039.37,1135.83 1166.26,1135.83 1168.22,1003.94

## Silkscreen, mask and mechanical layers (free items; w line width, h text height)
Top Overlay:
  lines w2: 1039.37,1135.83 1041.34,1003.94 1168.22,1003.94 1166.26,1135.83 1039.37,1135.83
  text "CAN" at 1435.04,1872.05 h39.37
  text "ENC1_485" at 271.65,1868.11 h43.31
  text "RS422" at 805.12,1868.11 h43.31
  text "ENC2_485" at 1704.72,1868.11 h43.31
  text "DEBUG" at 2271.65,1868.11 h43.31
  text "U3_TR" at 2885.5,1481.3 h43.31 r90
  text "RST" at 29.53,1403.54 h39.37
  text "PGND" at 2978.35,757.87 h39.37
  text "STM32G474VET6" at 1322.83,675.2 h39.37
  text "VM" at 3057.06,253.94 h39.37
  text "M1_A" at 261.81,34.12 h27.56
  text "M1_B" at 566.93,34.12 h27.56
  text "M1_C" at 872.05,34.12 h27.56
  text "IN_5V" at 1211.29,25.59 h43.31 r90
  text "M2_A" at 2095.8,19.68 h27.56 r90
  text "M2_B" at 2333.99,19.69 h27.56 r90
  text "M2_C" at 2643.05,19.68 h27.56 r90
Bottom Overlay:
  text "CLK" at 2362.2,2019.69 h39.37 r180
  text "DIO" at 2488.16,2019.69 h39.37 r180
  text "GND" at 2608.87,2019.69 h39.37 r180
  text "V5" at 2741.4,2019.69 h39.37 r180
Mechanical 1:
  the board outline again, w10